# Altium PCB ACS_PCB_P2.PcbDoc
Units mm, origin at the board's own origin, x right, y up, seen from the top; angles counter-clockwise.
Board outline 75.18 x 52.07 mm, 2 copper layers (Top Layer, Bottom Layer); 36 components, 25 nets, 130 pads, 0 vias.
Unrouted connection lines stored in the file: 70.
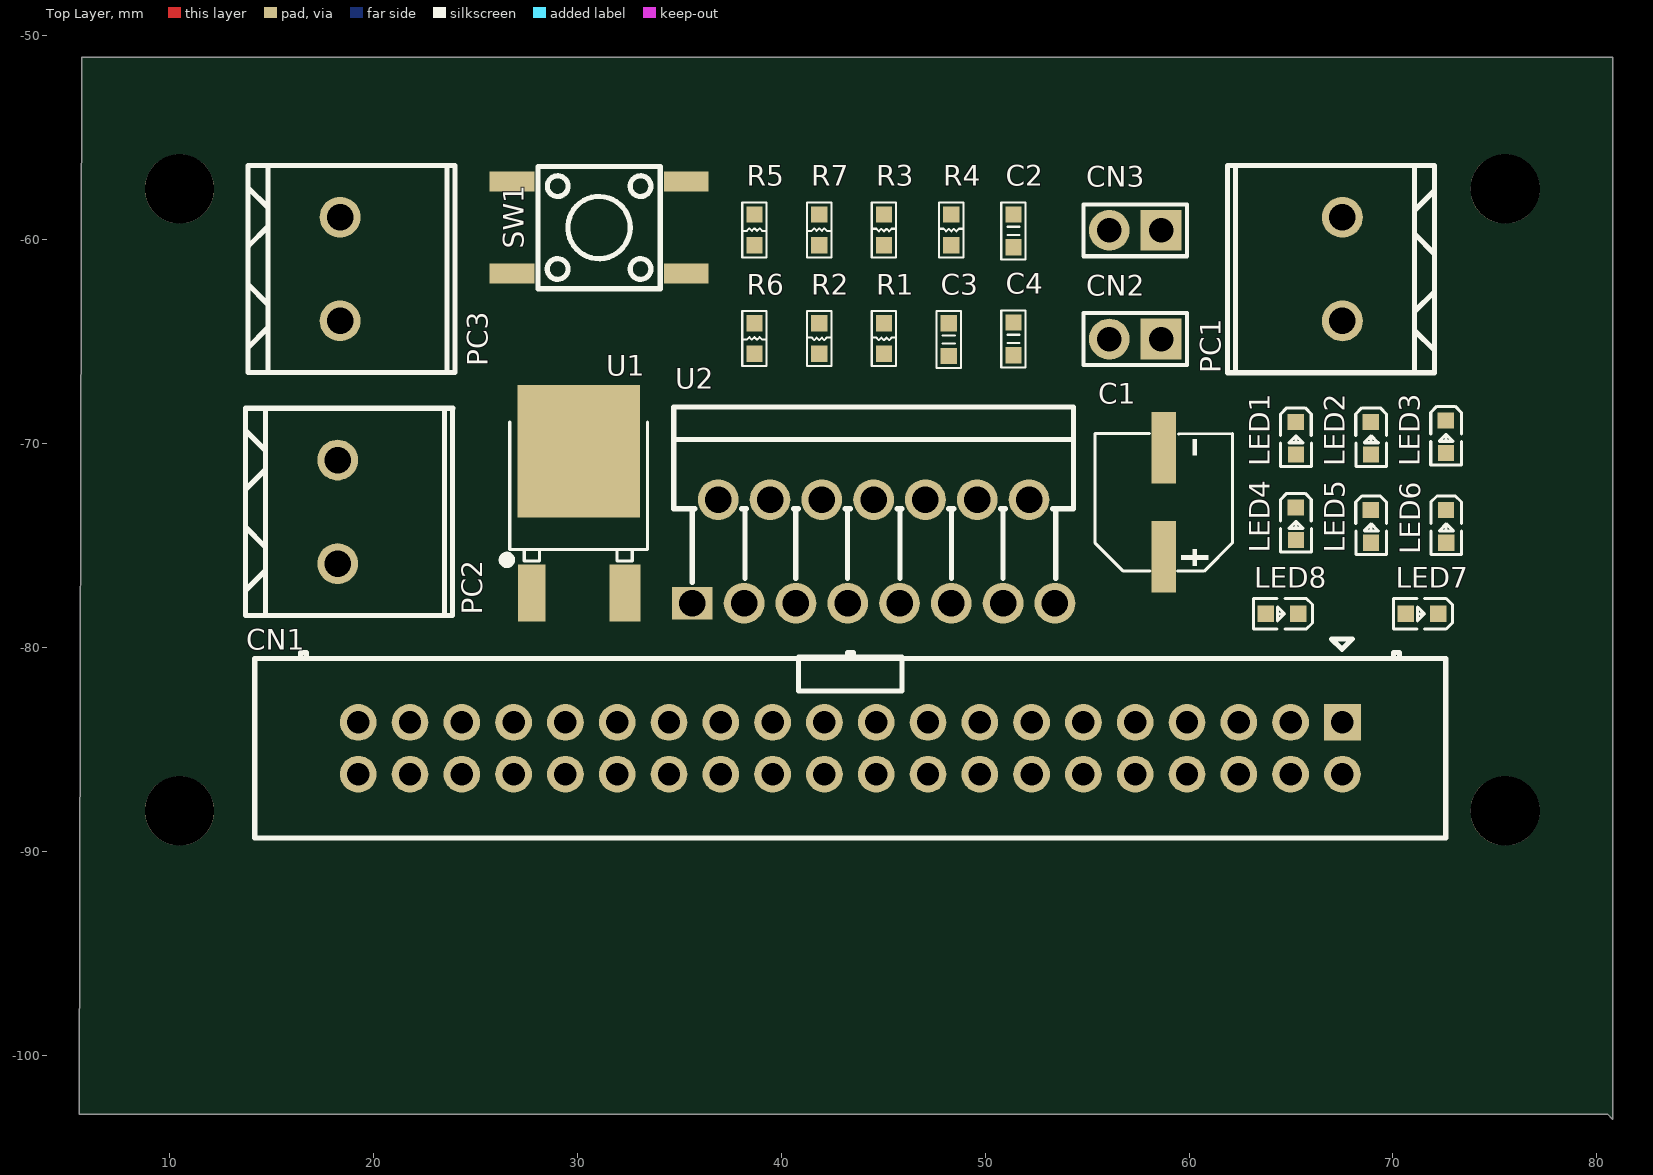
[diagram p0: Top Layer view]
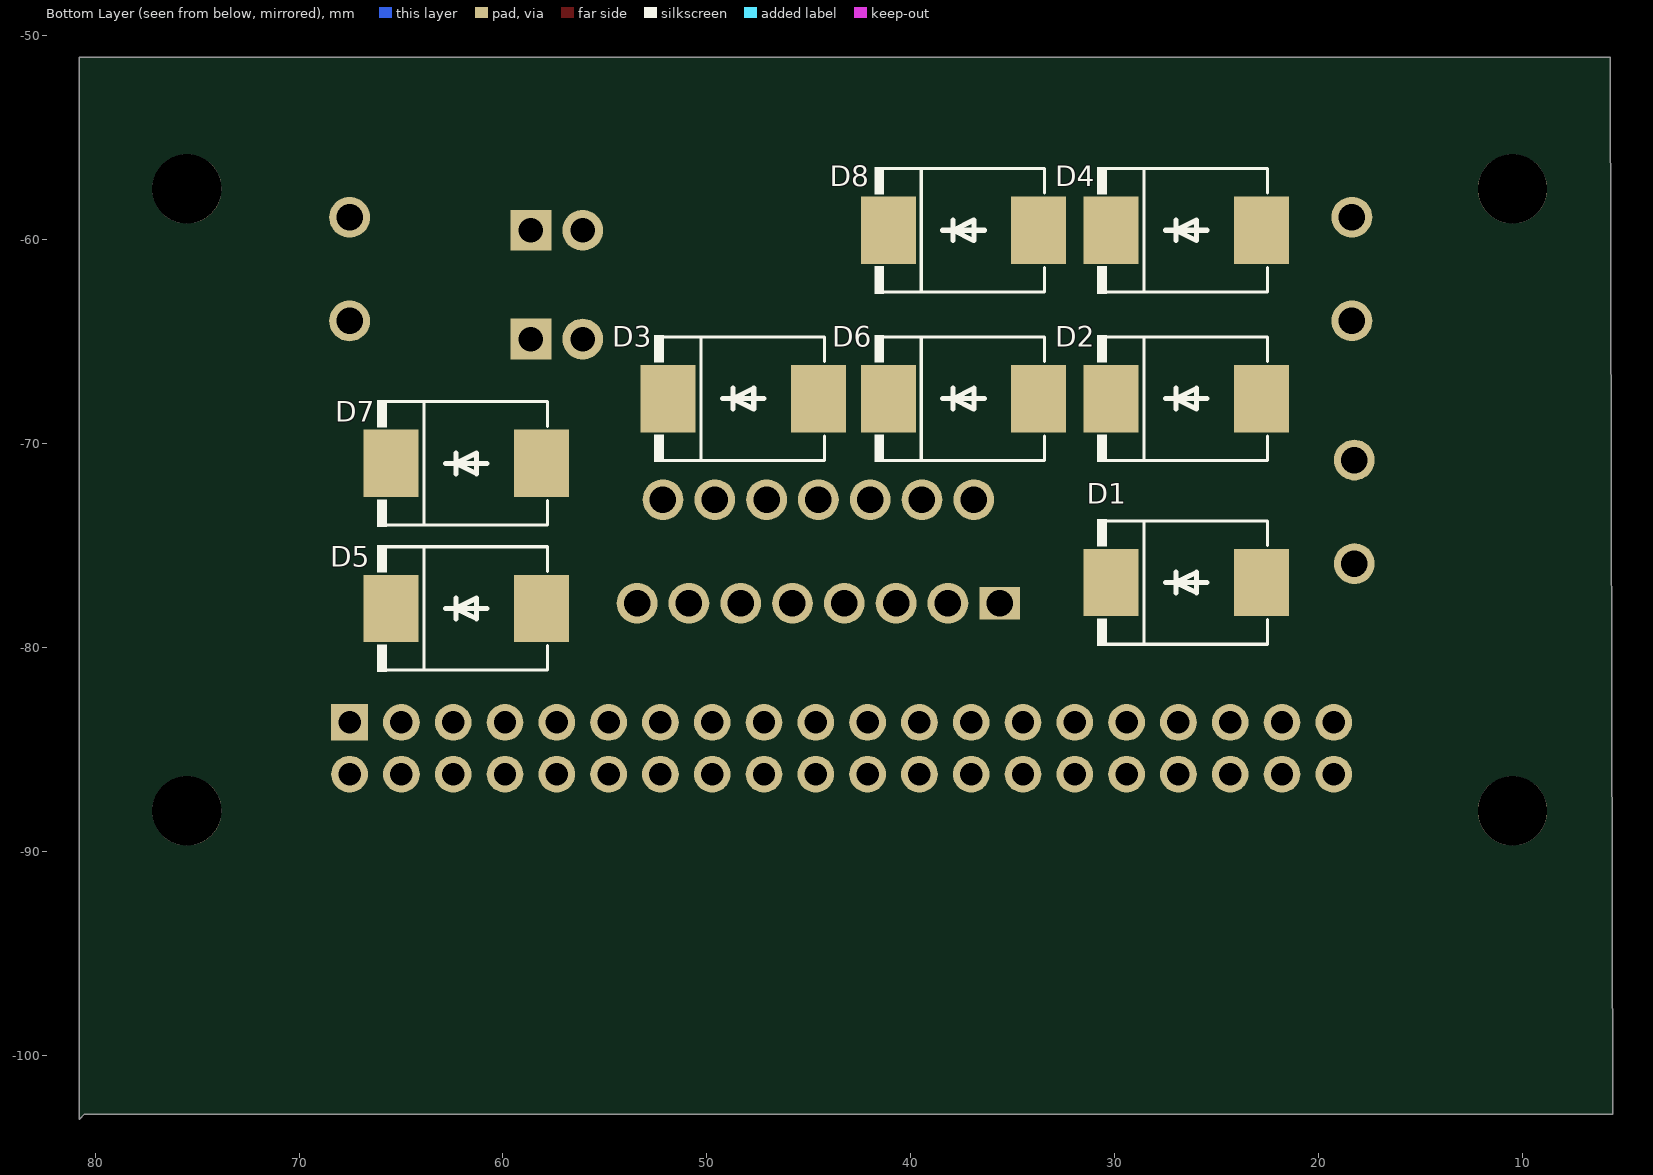
[diagram p1: Bottom Layer view, seen from below]

## Layer stack, top to bottom
Top Solder: solder mask 0.0102, Solder Resist, Dk 3.5
Top Layer: signal copper 0.0356
Dielectric 1: dielectric 0.32, FR-4, Dk 4.8
Bottom Layer: signal copper 0.0356
Bottom Solder: solder mask 0.0102, Solder Resist, Dk 3.5

## Board outline
5.715,-51.054 80.772,-51.054 80.772,-103.124 80.518,-102.87 5.588,-102.87

## Design rules (kind name [scope] priority, off if disabled: settings)
Clearance [All] p1: gap=0.1 ignorepadtopadclearanceinfootprint=FALSE
DiffPairsRouting [All] p1: maxlimit=0.254 minlimit=0.1 mostfreqgap=0.1 toplayer_minwidth=0.1 toplayer_maxwidth=1 toplayer_prefwidth=0.1 bottomlayer_minwidth=0.1 bottomlayer_maxwidth=1 bottomlayer_prefwidth=0.1 maxuncoupledlength=12.7
PolygonConnect [All] p1: connectstyle=Direct reliefconductorwidth=0.254 reliefentries=4 polygonreliefangle="90 Angle" airgapwidth=0.254
RoomDefinition ACS_sch [InComponentClass('ACS_sch')] p1: confinementstyle=ConfineIn formatcopy=TRUE lockcomponents=FALSE outline 8,-90.5 78,-90.5 78,-55 8,-55
RoutingVias [All] p1: holewidth=0.2 width=0.45 viastyle="Through Hole" minholewidth=0.2 minwidth=0.45 maxholewidth=0.5 maxwidth=1
SolderMaskExpansion [All] p1: expansion=0.102 istentingtop=FALSE
Width [All] p1: maxlimit=2 minlimit=0.1 preferedwidth=0.1
29 further rules are at their usual default settings.

## Components (designator, comment, footprint, x,y, rotation, side; value= is the part's Value field where it differs from the comment)
C1 "220u" C0605 58.758,-72.872 r90 top
C2 "0.1u" C0603 51.392,-59.56 r90 top
C3 "0.1u" C0603 48.217,-64.894 r90 top
C4 "0.1u" C0603 51.392,-64.856 r90 top
CN1 "GPIO_40Pin_M" GPIO_40Pin_M 43.391,-84.934 r180 top
CN2 "Connector" 2PIN 57.361,-64.868 r180 top
CN3 "Connector" 2PIN 57.361,-59.534 r180 top
D1 "SS52" SMC(DO-214AB) 26.373,-76.806 r180 bottom
D2 "SS52" SMC(DO-214AB) 26.373,-67.789 r180 bottom
D3 "SS52" SMC(DO-214AB) 48.09,-67.789 r180 bottom
D4 "SS52" SMC(DO-214AB) 26.373,-59.534 r180 bottom
D5 "SS52" SMC(DO-214AB) 61.679,-78.076 r180 bottom
D6 "SS52" SMC(DO-214AB) 37.295,-67.789 r180 bottom
D7 "SS52" SMC(DO-214AB) 61.679,-70.964 r180 bottom
D8 "SS52" SMC(DO-214AB) 37.295,-59.534 r180 bottom
LED1 "Green" LED0603 65.238,-69.731 r270 top
LED2 "Blue" LED0603 68.921,-69.731 r270 top
LED3 "Green" LED0603 72.597,-69.656 r270 top
LED4 "Blue" LED0603 65.238,-73.922 r270 top
LED5 "Green" LED0603 68.921,-74.049 r270 top
LED6 "Green" LED0603 72.604,-74.049 r270 top
LED7 "Green" LED0603 71.42,-78.333 r180 top
LED8 "Green" LED0603 64.562,-78.333 r180 top
PC1 "PConnector" PC_2Pin 67.521,-61.439 r90 top
PC2 "PConnector" PC_2Pin 18.253,-73.339 r270 top
PC3 "PConnector" PC_2Pin 18.372,-61.432 r270 top
R1 "20k" R0603 45.042,-64.844 r270 top
R2 "20k" R0603 41.867,-64.844 r270 top
R3 "20k" R0603 45.042,-59.51 r270 top
R4 "4.7k" R0603 48.344,-59.51 r270 top
R5 "220" R0603 38.692,-59.51 r90 top
R6 "220" R0603 38.692,-64.844 r90 top
R7 "10k" R0603 41.867,-59.51 r90 top
SW1 "Switch" Switch 31.072,-59.4 r90 top
U1 "78M05" 78M05 30.052,-73.839 r90 top
U2 "L298N" L298N 44.534,-75.282 r0 top

## Footprints (in the part's own frame and the unit in brackets; to place one, negate y for a bottom-side part, rotate by r counter-clockwise, add the part's x,y. Pads: shape width x height; smd on the part's side, far side on the other; paste and mask are expansions set on the pad)
2PIN [mm]
  rect 2x2 hole 1.2: 1(-1.27,0)
  round 2 hole 1.2: 2(1.27,0)
  silkscreen extent -2.54,-1.27 2.54,1.27
78M05 [mm] "TO-252-2"
  rect 2.8x1.35 smd: 1(-3.475,2.29)
  rect 2.8x1.5 smd: 3(-3.475,-2.29)
  rect 6.5x6 smd: 4(3.475,-0.017)
  silkscreen extent -2.06,-3.39 4.9,3.7
C0603 [mm]
  rect 0.8x0.8 smd: 1(-0.8,0) 2(0.8,0)
  silkscreen extent -1.4,-0.6 1.4,0.6, body extent -0.8,-0.41 0.8,0.41, height 0.9
C0605 [mm] "RVT220UF35V67RV0024"
  rect 3.5x1.2 smd: 1(-2.67,0) 2(2.67,0)
  silkscreen extent -3.38,-3.38 3.38,3.38
GPIO_40Pin_M [mm]
  rect 1.8x1.8 hole 1.1: 1(-24.13,-1.27)
  round 1.8 hole 1.1: 2(-24.13,1.27) 3(-21.59,-1.27) 4(-21.59,1.27) 5(-19.05,-1.27) 6(-19.05,1.27) 7(-16.51,-1.27) 8(-16.51,1.27) 9(-13.97,-1.27) 10(-13.97,1.27) 11(-11.43,-1.27) 12(-11.43,1.27) 13(-8.89,-1.27) 14(-8.89,1.27) 15(-6.35,-1.27) 16(-6.35,1.27) 17(-3.81,-1.27) 18(-3.81,1.27) 19(-1.27,-1.27) 20(-1.27,1.27) 21(1.27,-1.27) 22(1.27,1.27) 23(3.81,-1.27) 24(3.81,1.27) 25(6.35,-1.27) 26(6.35,1.27) 27(8.89,-1.27) 28(8.89,1.27) 29(11.43,-1.27) 30(11.43,1.27) 31(13.97,-1.27) 32(13.97,1.27) 33(16.51,-1.27) 34(16.51,1.27) 35(19.05,-1.27) 36(19.05,1.27) 37(21.59,-1.27) 38(21.59,1.27) 39(24.13,-1.27) 40(24.13,1.27)
  silkscreen extent -29.2,-5.36 29.2,4.4
L298N [mm] "Multiwatt 15"
  rect 2x1.6 hole 1.3: 1(-8.89,-2.54)
  round 2 hole 1.3: 2(-7.62,2.54) 3(-6.35,-2.54) 4(-5.08,2.54) 5(-3.81,-2.54) 6(-2.54,2.54) 7(-1.27,-2.54) 8(0,2.54) 9(1.27,-2.54) 10(2.54,2.54) 11(3.81,-2.54) 12(5.08,2.54) 13(6.35,-2.54) 14(7.62,2.54) 15(8.89,-2.54)
  silkscreen extent -9.8,-1.52 9.8,7.09
LED0603 [mm]
  rect 0.8x0.8 smd: 1(-0.799,-0.004) 2(0.799,0.004)
  silkscreen extent -1.49,-0.75 1.39,0.76
PC_2Pin [mm]
  round 2 hole 1.3: 1(-2.54,0) 2(2.54,0)
  silkscreen extent -5.08,-4.52 5.08,5.64
R0603 [mm]
  rect 0.8x0.8 smd: 1(-0.75,0) 2(0.75,0)
  silkscreen extent -1.35,-0.6 1.35,0.6, body extent -0.8,-0.4 0.8,0.41, height 0.9
SMC(DO-214AB) [mm]
  rect 2.7x3.3 smd: 1(-3.81,0) 2(3.563,0)
  silkscreen extent -4.48,-3.1 3.85,3.1
Switch [mm]
  rect 0.98x2.2 smd: 1(-2.25,-4.275) 2(-2.25,4.275) 3(2.25,-4.275) 4(2.25,4.275)
  silkscreen extent -3,-3 3,3

## Part data
C1: library part "cap 0605", "C0605 Electrolytic Capacitor"
C2 C3 C4: library part "cap 0603 NonE", "C0603 non Electrolytic Capacitor"
CN1: "GPIO 40pin Male Connector"
CN2 CN3: "2pin connector"
D1 D2 D3 D4 D5 D6 D7 D8: "SS52 Diode"
LED1 LED2 LED3 LED4 LED5 LED6 LED7 LED8: library part "led 0603", "LED0603"
PC1 PC2 PC3: "2Pin"
R1 R2 R3 R4 R5 R6 R7: library part "Res 0603", "Resistor", Rang=1%, Revision="July-2002: Re-released for DXP Platform."
U1: "Linear Voltage Regulators (LDO)"
U2: "HGSEMI L298N"

## Free pads (board coordinates)
  round 3.4 hole 3.4: ""(10.5,-88) ""(75.5,-88)
  round 3.4 hole 3.4 unplated: ""(10.5,-57.5) ""(75.5,-57.5)

## Nets (pads, with @x,y where several pads share a name; then routed paths per layer and width w, separated by ;. In a path a pad name is that pad's centre, name@x,y a point inside that pad or via, vN(x,y) a via of type N, cw(c..) or ccw(c..) an arc to the next point about the centre after c; other vN are vias at no path point)
3d3V_DC: CN1.1 R7.2
GND: C1.2 C2.2 C3.1 C4.1 CN1.6 CN2.2 CN3.1 D2.2 D4.2 D6.2 D8.2 PC1.1 R3.1 R4.1 R5.1 R6.1 SW1.3 U1.4 U2.8
GPIO5: CN1.29 U2.11
GPIO6: CN1.31 U2.12
GPIO13: CN1.33 U2.10
GPIO14: CN1.12 LED7.2
GPIO17: CN1.11 U2.6
GPIO18: CN1.16 LED8.2
GPIO22: CN1.15 U2.7
GPIO25: CN1.22 R7.1 SW1.1
GPIO27: CN1.13 U2.5
NetCN2_1: CN2.1 U2.1
NetCN3_2: CN3.2 U2.15
NetLED1_1: LED1.1 LED2.2 R1.2
NetLED3_1: LED3.1 LED4.2 R2.2
NetLED5_1: LED5.1 R3.2
NetLED6_1: LED6.1 R4.2
NetLED7_1: LED7.1 R5.2
NetLED8_1: LED8.1 R6.2
Output1: D1.2 D2.1 LED1.2 LED2.1 PC2.1 U2.2
Output2: D3.2 D4.1 PC2.2 R1.1 U2.3
Output3: D5.2 D6.1 LED3.2 LED4.1 PC3.1 U2.13
Output4: D7.2 D8.1 PC3.2 R2.1 U2.14
VCC_12V: C1.1 C3.2 D1.1 D3.1 D5.1 D7.1 LED5.2 PC1.2 U1.1 U2.4
VSS_5V: C2.1 C4.2 LED6.2 U1.3 U2.9
pads on no net: CN1.2 CN1.3 CN1.4 CN1.5 CN1.7 CN1.8 CN1.9 CN1.10 CN1.14 CN1.17 CN1.18 CN1.19 CN1.20 CN1.21 CN1.23 CN1.24 CN1.25 CN1.26 CN1.27 CN1.28 CN1.30 CN1.32 CN1.34 CN1.35 CN1.36 CN1.37 CN1.38 CN1.39 CN1.40 SW1.2 SW1.4